# Altium PCB PCB1.PcbDoc
Units mm, origin at the board's own origin, x right, y up, seen from the top; angles counter-clockwise.
Board outline 58.8 x 50.6 mm, 4 copper layers (Top Layer, GND, PGND, Bottom Layer), stack 0.603 mm thick; 5 components, 8 nets, 27 pads, 22 vias.
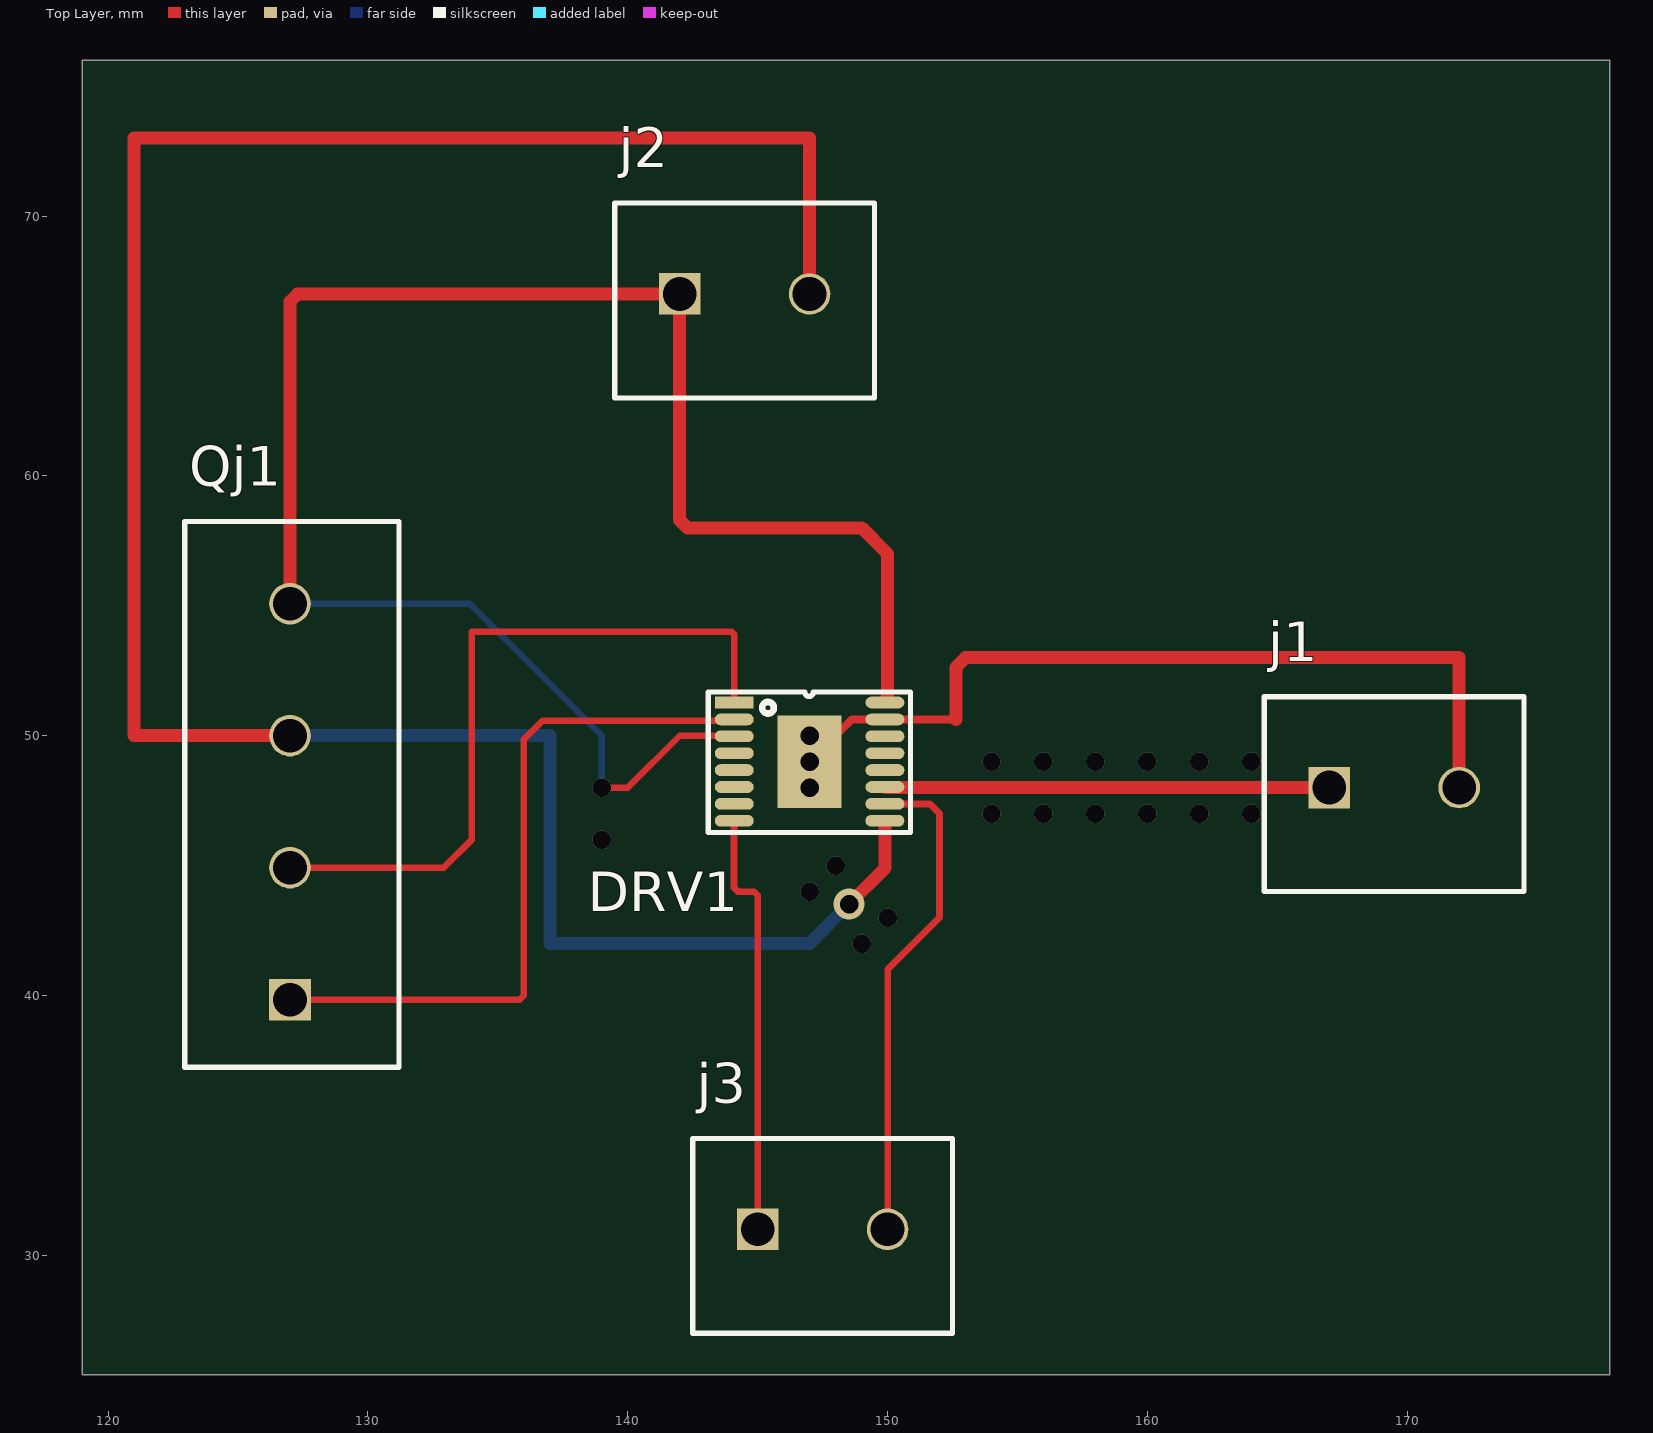
[diagram p0: Top Layer view]
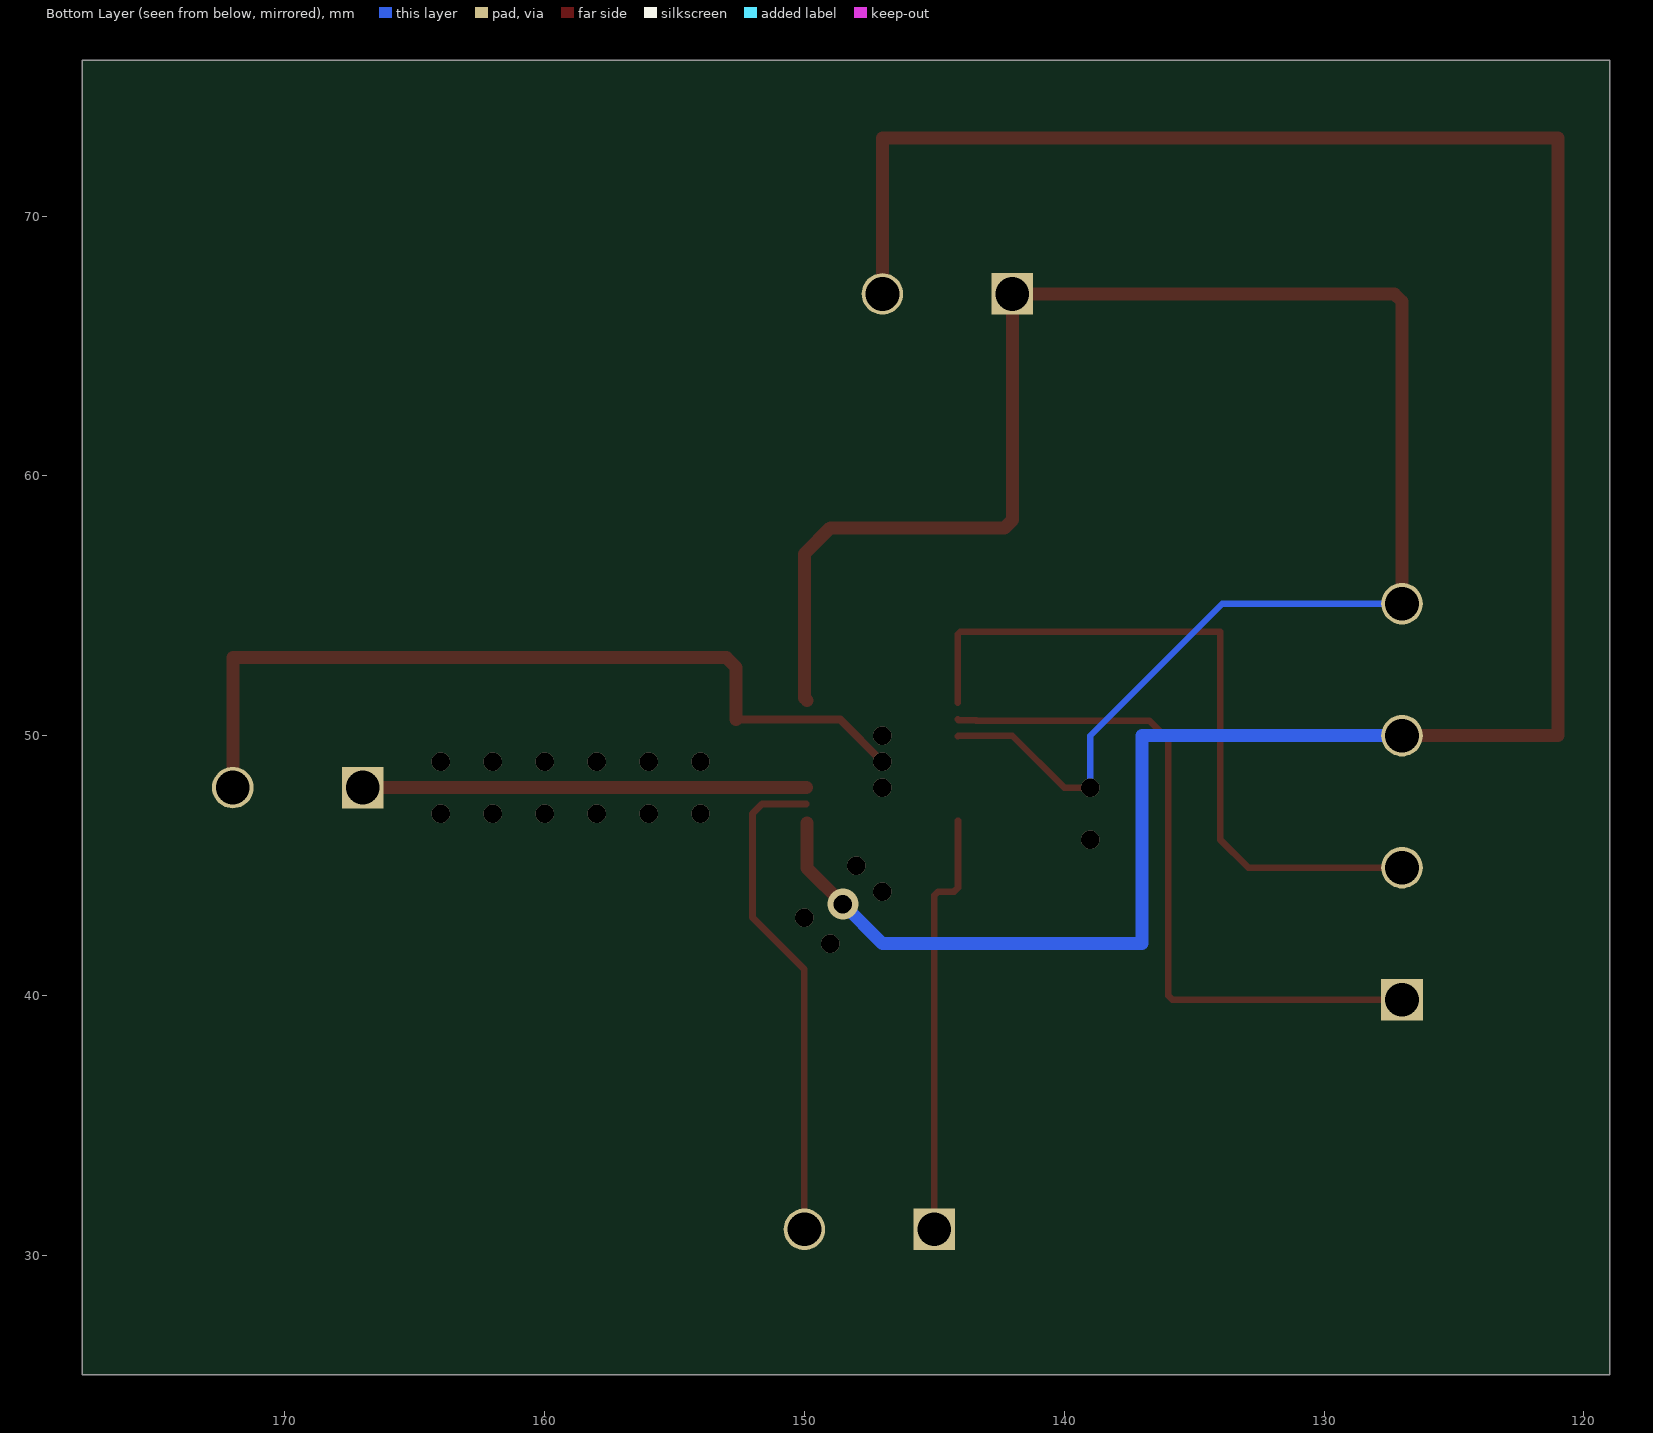
[diagram p1: Bottom Layer view, seen from below]
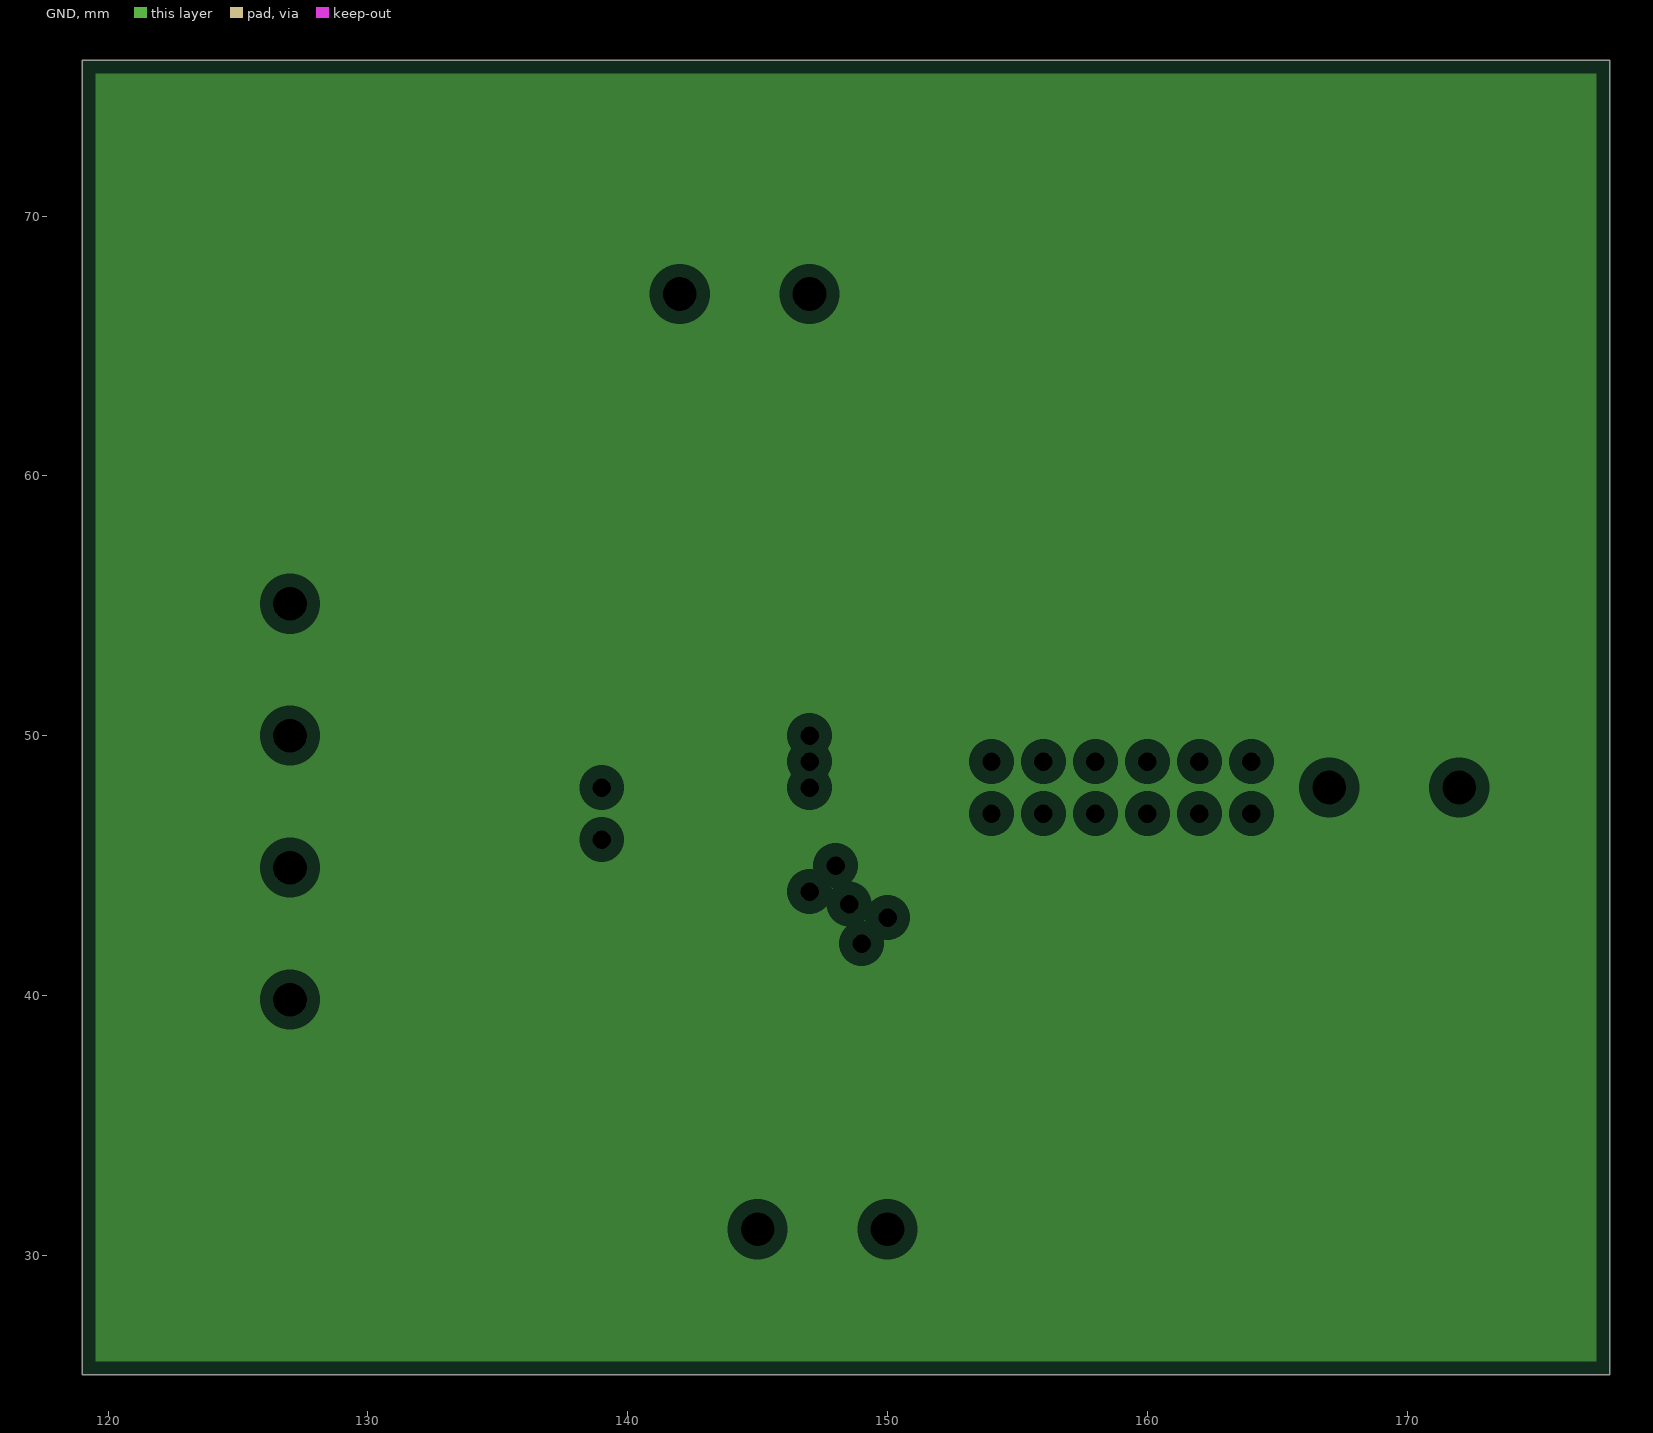
[diagram p2: GND, clearances drawn from the general rule]
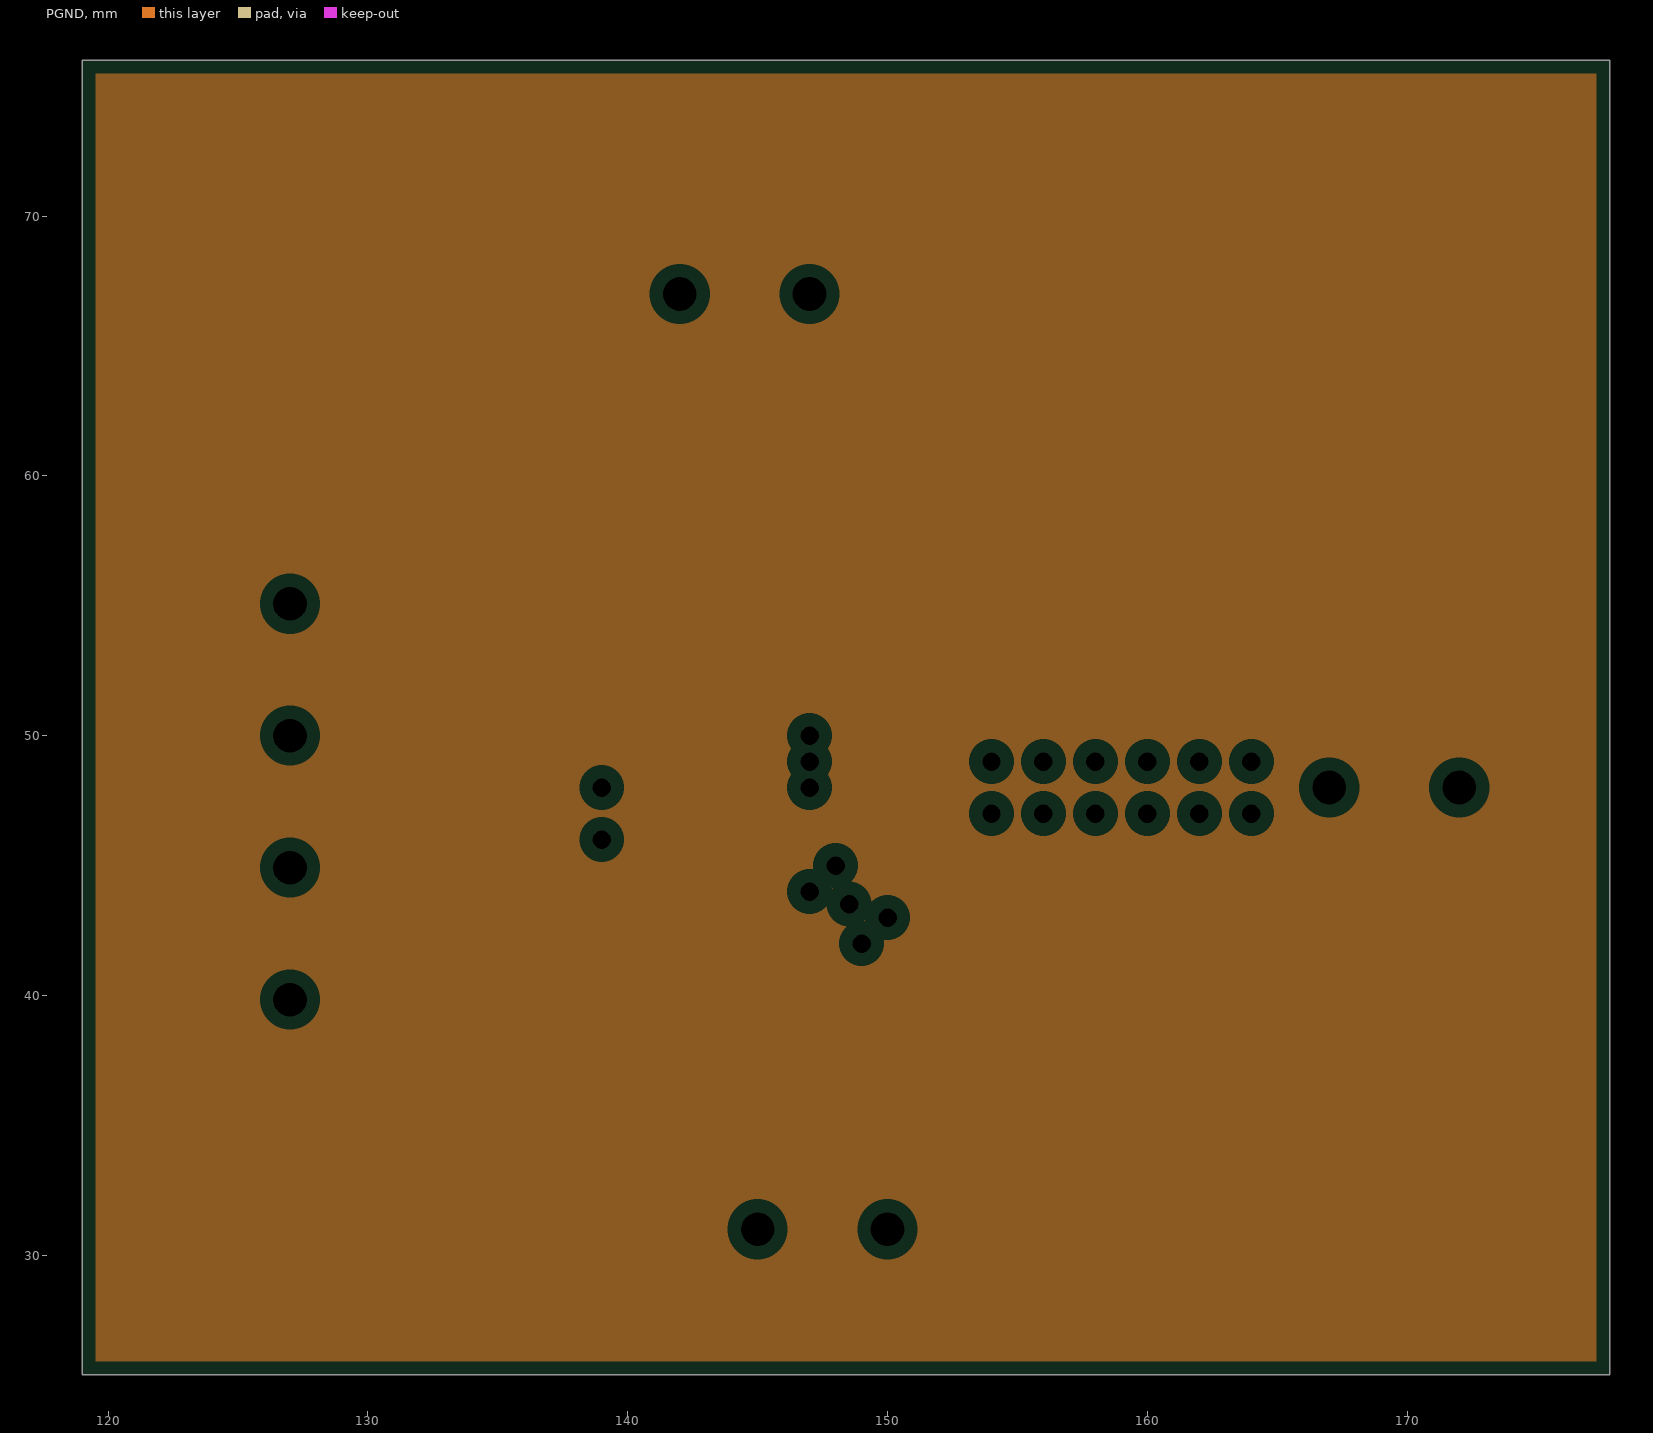
[diagram p3: PGND, clearances drawn from the general rule]

## Layer stack, top to bottom
Top Solder: solder mask 0.0102, Solder Resist, Dk 3.5
Top Layer: signal copper 0.0356
Dielectric 2: prepreg 0.0711, PP-006, Dk 4.1
GND: plane copper 0.035, net GND
Dielectric 1: dielectric 0.32, FR-4, Dk 4.8
PGND: plane copper 0.035, net PGND
Dielectric 3: prepreg 0.0711, PP-006, Dk 4.1
Bottom Layer: signal copper 0.0356
Bottom Solder: solder mask 0.0102, Solder Resist, Dk 3.5

## Board outline
119,25.4 177.8,25.4 177.8,76 119,76

## Design rules (kind name [scope] priority, off if disabled: settings)
Clearance [All] p1: gap=0.254 ignorepadtopadclearanceinfootprint=FALSE
PlaneClearance [All] p1: clearance=0.508
PlaneConnect [All] p1: planeconnectstyle=Relief reliefexpansion=0.508 reliefentries=4 reliefconductorwidth=0.254 reliefairgap=0.254
PolygonConnect [All] p1: connectstyle=Relief reliefconductorwidth=0.254 reliefentries=4 polygonreliefangle="90 Angle" airgapwidth=0.254
RoutingVias [All] p1: holewidth=0.711 width=1.4 viastyle="Through Hole" minholewidth=0.711 minwidth=0.5 maxholewidth=0.711 maxwidth=1.6
SolderMaskExpansion [All] p1: expansion=0.102 istentingtop=FALSE
Width [All] p1: maxlimit=1 minlimit=0.2 preferedwidth=0.254
28 further rules are at their usual default settings.

## Components (designator, comment, footprint, x,y, rotation, side; value= is the part's Value field where it differs from the comment)
DRV1 "DRV8874" DRV8874 146.999,49 r0 top
j1 "terminal" terminal 167,48 r0 top
j2 "terminal" terminal 142,67 r0 top
j3 "terminal" terminal 145,31 r0 top
Qj1 "4_terminal" "4 position terminal block" 127,39.84 r90 top

## Footprints (in the part's own frame and the unit in brackets; to place one, negate y for a bottom-side part, rotate by r counter-clockwise, add the part's x,y. Pads: shape width x height; smd on the part's side, far side on the other; paste and mask are expansions set on the pad)
"4 position terminal block" [mm]
  rect 1.6x1.6 hole 1.3: 1(0,0)
  round 1.6 hole 1.3: 2(5.08,0) 3(10.16,0) 4(15.24,0)
  silkscreen extent -2.6,-4.2 18.4,4.05, body extent -2.51,-4.15 18.37,4, height 9.97
DRV8874 [mm]
  rect 1.5x0.45 smd: 1(-2.9,2.275)
  oval 1.5x0.45 smd: 2(-2.9,1.625) 3(-2.9,0.975) 4(-2.9,0.325) 5(-2.9,-0.325) 6(-2.9,-0.975) 7(-2.9,-1.625) 8(-2.9,-2.275) 9(2.9,-2.275) 10(2.9,-1.625) 11(2.9,-0.975) 12(2.9,-0.325) 13(2.9,0.325) 14(2.9,0.975) 15(2.9,1.625) 16(2.9,2.275)
  rect 2.46x3.55 smd mask-2539.97: 17(0.001,0)
  silkscreen extent -3.9,-2.72 3.88,2.68, body extent -3.2,-2.52 3.2,2.48, height 1.2
terminal [mm]
  rect 1.6x1.6 hole 1.3: 1(0,0)
  round 1.6 hole 1.3: 2(5,0)
  silkscreen extent -2.5,-4 7.5,3.5, body extent -2.5,-4 7.5,3.5, height 11.5

## Part data
DRV1: library part DRV8874QPWPRQ1, "Brush DC Motor Controller, 6A, PDSO16", Manufacturer="Texas Instruments", Supplier Part Number=296-DRV8874QPWPRQ1DKR-ND, Category="Integrated Circuits (ICs)", ComponentLink1Description=https://www.ti.com:443/lit/ds/symlink/drv8874-q1.pdf?src-supplier=IHS+Markit, ComponentLink1URL=https://www.ti.com:443/lit/ds/symlink/drv8874-q1.pdf?src-supplier=IHS+Markit, Manufacturer Part Number=DRV8874QPWPRQ1, Pricing="1=2.89, 10=2.596, 25=2.4544, 100=2.1271, 250=2.018, 500=1.81072, 1000=1.52712 (USD)", RoHS=Yes, RoHS Compliant=Yes, Supplier=Digikey
j1 j2 j3: library part 691137710002, "Barrier Strip Terminal Block", Manufacturer="Wurth Electronics", Supplier Part Number=1769908, Category="Terminal Blocks", ComponentLink1Description=https://datasheet.ciiva.com:443/pdfs/VipMasterIC/IC/MIDC/MIDC-S-A0005074262/MIDC-S-A0004711666-1.pdf?src-supplier=IHS+Markit, ComponentLink1URL=https://datasheet.ciiva.com:443/pdfs/VipMasterIC/IC/MIDC/MIDC-S-A0005074262/MIDC-S-A0004711666-1.pdf?src-supplier=IHS+Markit, ComponentLink2Description=https://katalog.we-online.de/em/datasheet/691137710002.pdf?src-supplier=Digikey, ComponentLink2URL=https://katalog.we-online.de/em/datasheet/691137710002.pdf?src-supplier=Digikey, Manufacturer Part Number=691137710002, Pricing="500=0.218, 1000=0.202, 2500=0.189 (GBP)", RoHS=No, RoHS Compliant=Yes, Stock=355, Supplier=Rs
Qj1: library part 1934887, "Barrier Strip Terminal Block, 12A, 1.5mm2, 1 Row(s), 1 Deck(s)", Current Rating=12A, Manufacturer="Phoenix Contact", Supplier Part Number=4680931, Voltage Rating=250V, Category="Terminal Blocks", ComponentLink1Description=https://www.phoenixcontact.com:443/online/portal/us?uri=pxc-oc-itemdetail%3apid%3d1934887&library=usen&pcck=P-11-02-11&tab=1&src-supplier=IHS+Markit, ComponentLink1URL=https://www.phoenixcontact.com:443/online/portal/us?uri=pxc-oc-itemdetail%3apid%3d1934887&library=usen&pcck=P-11-02-11&tab=1&src-supplier=IHS+Markit, ComponentLink2Description=https://datasheet.ciiva.com/16047/1934887-16047240.pdf?src-supplier=Onlinecomponents.com, ComponentLink2URL=https://datasheet.ciiva.com/16047/1934887-16047240.pdf?src-supplier=Onlinecomponents.com, ComponentLink3Description=https://datasheet.ciiva.com/15169/getdatasheetpartid-177849-15169637.pdf?src-supplier=Verical, ComponentLink3URL=https://datasheet.ciiva.com/15169/getdatasheetpartid-177849-15169637.pdf?src-supplier=Verical, ComponentLink4Description=https://datasheet.ciiva.com/795/combiconcompact5-0mmseries-795415.pdf?src-supplier=Digikey, ComponentLink4URL=https://datasheet.ciiva.com/795/combiconcompact5-0mmseries-795415.pdf?src-supplier=Digikey, ComponentLink5Description=https://datasheet.ciiva.com/14608/70054929-14608235.pdf?src-supplier=Allied+Electronics, ComponentLink5URL=https://datasheet.ciiva.com/14608/70054929-14608235.pdf?src-supplier=Allied+Electronics, ComponentLink6Description=https://datasheet.ciiva.com/29224/744154-da-01-en-printklemme-pt-1-5-4-pvh-5-0-29224875.pdf?src-supplier=Conrad, ComponentLink6URL=https://datasheet.ciiva.com/29224/744154-da-01-en-printklemme-pt-1-5-4-pvh-5-0-29224875.pdf?src-supplier=Conrad, Fastening Method=SCREW, Manufacturer Part Number=1934887, Mounting Technology=Board, Number of Decks=1, Number of Rows=1, Number of Ways=4, Pricing="5=1.204, 125=1.172, 375=1.14, 1000=1.108, 2000=1.08 (GBP)", Reach SVHC Compliant=Yes, RoHS=Yes, RoHS Compliant=Yes, Safety Approval=UL, Stock=125, Supplier=Rs, Terminal and Terminal Block Type="BARRIER STRIP TERMINAL BLOCK", Wire Cross Section=1.5mm2, Wire/Cable Gauge=14AWG

## Via types
v1: diameter 0.711, hole 0.711, Top Layer to Bottom Layer, 21 vias
v2: diameter 1.2, hole 0.711, Top Layer to Bottom Layer, 1 vias

## Nets (pads, with @x,y where several pads share a name; then routed paths per layer and width w, separated by ;. In a path a pad name is that pad's centre, name@x,y a point inside that pad or via, vN(x,y) a via of type N, cw(c..) or ccw(c..) an arc to the next point about the centre after c; other vN are vias at no path point)
GND: DRV1.15 DRV1.17 j1.2 | length 32.8
  Top Layer w0.3: v1(147,49) 148.625,50.625 DRV1.15 152.625,50.625
  Top Layer w0.5: 152.625,50.625 152.625,52.625 153,53 172,53 j1.2
  other v1: 147,48 147,50
NetDRV1_1: DRV1.1 Qj1.2 | length 28.2
  Top Layer w0.254: Qj1.2 132.92,44.92 134,46 134,54 144,54 144.099,53.901 DRV1.1
NetDRV1_2: DRV1.2 Qj1.1 | length 27.3
  Top Layer w0.254: Qj1.1 135.84,39.84 136,40 136,49.851 136.729,50.581 143.391,50.581 143.398,50.587 144.061,50.587 DRV1.2
NetDRV1_8: DRV1.8 j3.1 | length 16.5
  Top Layer w0.254: DRV1.8@144.091,46.725 144.091,44.149 144.239,44 144.851,44 145,43.851 j3.1
NetDRV1_10: DRV1.10 j3.2 | length 19.1
  Top Layer w0.254: DRV1.10@149.924,47.369 151.631,47.369 152,47 152,43 150,41 j3.2
PGND: DRV1.9 j2.2 Qj1.3 | length 94.8
  Top Layer w0.5: Qj1.3 121,50 121,73 147,73 j2.2 ; v2(148.518,43.518) 149.899,44.899 DRV1.9@149.899,46.646
  Bottom Layer w0.5: Qj1.3 137,50 137,42 147,42 v2(148.518,43.518)
VCC_LOGIC: DRV1.3 DRV1.16 j2.1 Qj1.4 | length 71.8
  Top Layer w0.254: v1(139,48) 140,48 142,50 144.074,50 DRV1.3
  Top Layer w0.5: Qj1.4 127,66.707 127.293,67 j2.1 142,58.293 142.293,58 149,58 150,57 150,51.455 DRV1.16@149.899,51.354
  Bottom Layer w0.254: Qj1.4 133.92,55.08 139,50 v1(139,48)
  Bottom Layer w0.5: Qj1.4 Qj1.4@127.08,55
VCC_MOTOR: DRV1.11 j1.1 | length 17.1
  Top Layer w0.254: DRV1.11 DRV1.11@149.924,48
  Top Layer w0.5: DRV1.11@149.924,48 j1.1
pads on no net: DRV1.4 DRV1.5 DRV1.6 DRV1.7 DRV1.12 DRV1.13 DRV1.14
copper on no net:
  other v1: 149,42 150,43 147,44 148,45 139,46 154,47 156,47 158,47 160,47 162,47 164,47 154,49 156,49 158,49 160,49 162,49 164,49

## Polygon pours and split planes (outlines as drawn)
no net on PGND (split plane): 177.29,25.91 119.51,25.91 119.51,75.49 177.29,75.49
no net on GND (split plane): 177.29,25.91 119.51,25.91 119.51,75.49 177.29,75.49